# EAGLE board CT_schematic (EAGLE 7.6.0)

Size 100 x 80 mm. Coordinates in mm from the lower left corner, seen from the top.
Outline: 0,0 100,0 100,80 0,80 0,0
Copper layers (1*16): Top 0.035mm / dielectric 1.5mm / Bottom 0.035mm
Design rules "default": minimum track width 10mil, minimum drill 24mil, track to track 8mil, track to pad 8mil, pad to pad 8mil, via to via 8mil, smd to smd 8mil, copper to edge 40mil, drill to drill 8mil, minimum pad ring 10mil, minimum via ring 8mil, stop-mask expansion 4mil, vias tented up to drill 0mil, thermal gap 10mil

## Footprints (pad centres in the part's own frame; a part is rotated, then mirrored left to right if it is on the bottom)
C0603 = smd 0.8 x 0.8: 1 -0.762,0; 2 0.762,0
C0402 = smd 0.5 x 0.5: 1 -0.508,0; 2 0.508,0
C0805 = smd 1.2 x 1.3: 1 -1.016,0; 2 1.016,0
C1206 = smd 1.3 x 1.6: 1 -1.524,0; 2 1.524,0
C1210 = smd 1.2 x 2.5: 1 -1.524,0; 2 1.524,0
2220 = smd 1.85 x 5.5: 1 -2.55,0; 2 2.55,0
EXV-9H = smd 3.505 x 1.676: 1 -2.857,0; 2 2.857,0
L0603 = smd 0.8 x 0.8: 1 -0.762,0; 2 0.762,0
R0603 = smd 0.8 x 0.8: 1 -0.762,0; 2 0.762,0
WE-HCI_7030/7040/7050 = smd 2.5 x 3: 1 -2.45,0; 2 2.45,0
PJ-037B_PACKAGE = drill 3.7 square: 1 12,0 | drill 3.2 square: 2 6,0
LQFP144 = smd 0.35 x 1.35: 1 -8.75,-10.625; 2 -8.25,-10.625; 3 -7.75,-10.625; 4 -7.25,-10.625; 5 -6.75,-10.625; 6 -6.25,-10.625; 7 -5.75,-10.625; 8 -5.25,-10.625; 9 -4.75,-10.625; 10 -4.25,-10.625; 11 -3.75,-10.625; 12 -3.25,-10.625; 13 -2.75,-10.62; 14 -2.25,-10.625; 15 -1.75,-10.625; 16 -1.25,-10.625; 17 -0.75,-10.625; 18 -0.25,-10.625; 19 0.25,-10.625; 20 0.75,-10.625; 21 1.25,-10.625; 22 1.75,-10.625; 23 2.25,-10.625; 24 2.75,-10.62; 25 3.25,-10.625; 26 3.75,-10.625; 27 4.25,-10.625; 28 4.75,-10.625; 29 5.25,-10.625; 30 5.75,-10.625; 31 6.25,-10.625; 32 6.75,-10.625; 33 7.25,-10.625; 34 7.75,-10.625; 35 8.25,-10.625; 36 8.75,-10.625; 73 8.75,10.625; 74 8.25,10.625; 75 7.75,10.625; 76 7.25,10.625; 77 6.75,10.625; 78 6.25,10.625; 79 5.75,10.625; 80 5.25,10.625; 81 4.75,10.625; 82 4.25,10.625; 83 3.75,10.625; 84 3.25,10.625; 85 2.75,10.625; 86 2.25,10.625; 87 1.75,10.625; 88 1.25,10.625; 89 0.75,10.625; 90 0.25,10.625; 91 -0.25,10.625; 92 -0.75,10.625; 93 -1.25,10.625; 94 -1.75,10.625; 95 -2.25,10.625; 96 -2.75,10.625; 97 -3.25,10.625; 98 -3.75,10.625; 99 -4.25,10.625; 100 -4.75,10.625; 101 -5.25,10.625; 102 -5.75,10.625; 103 -6.25,10.625; 104 -6.75,10.625; 105 -7.25,10.625; 106 -7.75,10.625; 107 -8.25,10.625; 108 -8.75,10.625 | smd 1.35 x 0.35: 37 10.625,-8.75; 38 10.625,-8.25; 39 10.625,-7.75; 40 10.625,-7.25; 41 10.625,-6.75; 42 10.625,-6.25; 43 10.625,-5.75; 44 10.625,-5.25; 45 10.625,-4.75; 46 10.625,-4.25; 47 10.625,-3.75; 48 10.625,-3.25; 49 10.625,-2.75; 50 10.625,-2.25; 51 10.625,-1.75; 52 10.625,-1.25; 53 10.625,-0.75; 54 10.625,-0.25; 55 10.625,0.25; 56 10.625,0.75; 57 10.625,1.25; 58 10.625,1.75; 59 10.625,2.25; 60 10.625,2.75; 61 10.625,3.25; 62 10.625,3.75; 63 10.625,4.25; 64 10.625,4.75; 65 10.625,5.25; 66 10.625,5.75; 67 10.625,6.25; 68 10.625,6.75; 69 10.625,7.25; 70 10.625,7.75; 71 10.625,8.25; 72 10.625,8.75; 109 -10.625,8.75; 110 -10.625,8.25; 111 -10.625,7.75; 112 -10.625,7.25; 113 -10.625,6.75; 114 -10.625,6.25; 115 -10.625,5.75; 116 -10.625,5.25; 117 -10.625,4.75; 118 -10.625,4.25; 119 -10.625,3.75; 120 -10.625,3.25; 121 -10.625,2.75; 122 -10.625,2.25; 123 -10.625,1.75; 124 -10.625,1.25; 125 -10.625,0.75; 126 -10.625,0.25; 127 -10.625,-0.25; 128 -10.625,-0.75; 129 -10.625,-1.25; 130 -10.625,-1.75; 131 -10.625,-2.25; 132 -10.625,-2.75; 133 -10.625,-3.25; 134 -10.625,-3.75; 135 -10.625,-4.25; 136 -10.625,-4.75; 137 -10.625,-5.25; 138 -10.625,-5.75; 139 -10.625,-6.25; 140 -10.625,-6.75; 141 -10.625,-7.25; 142 -10.625,-7.75; 143 -10.625,-8.25; 144 -10.625,-8.75
SOT-23-6 = smd 1.1 x 0.6: 1 -1.4,0.95; 2 -1.4,0; 3 -1.4,-0.95; 4 1.4,-0.95; 5 1.4,0; 6 1.4,0.95
SOIC-8 = smd 1.6 x 0.6: 1 -2.7,1.905 | smd 1.55 x 0.6: 2 -2.7,0.635; 3 -2.7,-0.635; 4 -2.7,-1.905; 5 2.7,-1.905; 6 2.7,-0.635; 7 2.7,0.635; 8 2.7,1.905
QFN-32 = smd 0.6 x 0.3: 1 -2.3,1.75; 2 -2.3,1.25; 3 -2.3,0.75; 4 -2.3,0.25; 5 -2.3,-0.25; 6 -2.3,-0.75; 7 -2.3,-1.25; 8 -2.3,-1.75; 17 2.3,-1.75; 18 2.3,-1.25; 19 2.3,-0.75; 20 2.3,-0.25; 21 2.3,0.25; 22 2.3,0.75; 23 2.3,1.25; 24 2.3,1.75 | smd 0.3 x 0.6: 9 -1.75,-2.3; 10 -1.25,-2.3; 11 -0.75,-2.3; 12 -0.25,-2.3; 13 0.25,-2.3; 14 0.75,-2.3; 15 1.25,-2.3; 16 1.75,-2.3; 25 1.75,2.3; 26 1.25,2.3; 27 0.75,2.3; 28 0.25,2.3; 29 -0.25,2.3; 30 -0.75,2.3; 31 -1.25,2.3; 32 -1.75,2.3 | smd 3.2 x 3.2: EXP 0,0
7498011122R = smd 0.71 x 2.29: 1 -3.545,-3.18; 2 -2.525,-3.18; 3 -1.505,-3.18; 4 -0.485,-3.18; 5 0.535,-3.18; 6 1.555,-3.18; 8 3.595,-3.18; 9 5.635,-3.18; 10 6.655,-3.18; 11 -6.605,-3.18; 12 -5.585,-3.18 | smd 1.4 x 2.54: 13 -8.51,10.2; 14 8.51,10.2 | hole 1.4: -3.5,0; 3.5,0
S29VS256RABBHW000 = smd 0.3 x 0.3: A1 -6,3; A14 0.5,3; C3 -5,2; C4 -4.5,2; C5 -4,2; C6 -3.5,2; C7 -3,2; C8 -2.5,2; C9 -2,2; C10 -1.5,2; C11 -1,2; C12 -0.5,2; D3 -5,1.5; D4 -4.5,1.5; D5 -4,1.5; D6 -3.5,1.5; D7 -3,1.5; D8 -2.5,1.5; D9 -2,1.5; D10 -1.5,1.5; D11 -1,1.5; D12 -0.5,1.5; E3 -5,1; E4 -4.5,1; E5 -4,1; E6 -3.5,1; E7 -3,1; E8 -2.5,1; E9 -2,1; E10 -1.5,1; E11 -1,1; E12 -0.5,1; F3 -5,0.5; F4 -4.5,0.5; F5 -4,0.5; F6 -3.5,0.5; F7 -3,0.5; F8 -2.5,0.5; F9 -2,0.5; F10 -1.5,0.5; F11 -1,0.5; F12 -0.5,0.5; H1 -6,-0.5; H14 0.5,-0.5
MICRO_USB_AB = smd 0.4 x 1.35: 1 1.3,0.26; 2 0.65,0.26; 3 0,0.26; 4 -0.65,0.26; 5 -1.3,0.26 | drill 0.6 pad 0.95 long: 6 4.175,-2.54; 7 -4.175,-2.54 | drill 0.7 pad 1.1 long: 8 -2.225,0.46; 9 2.225,0.46
SOT143B = smd 1 x 0.7: 1 -0.75,-1 | smd 0.6 x 0.7: 2 0.95,-1; 3 0.95,1; 4 -0.95,1
ABS07-32.768KHZ-7-T = smd 1.1 x 2.4: 1 -2.5,0; 2 0,0
ABLS-25.000MHZ-B2F-T = smd 5.6 x 2.8: 1 -3.81,0; 2 5.69,0
ASFL1 = smd 1.7 x 1.5: 1 -1.27,-1.1; 2 1.27,-1.1; 3 1.27,1.1; 4 -1.27,1.1
WSON-8 = smd 0.3 x 0.6: 1 -0.75,0; 2 0.05,0; 3 0.85,0; 4 1.65,0; 5 1.65,3.8; 6 0.85,3.8; 7 0.05,3.8; 8 -0.75,3.8 | smd 3 x 2.6: PAD 0.45,1.9
SOIC-8_EP = smd 1.6 x 0.533: 1 -2.921,1.905; 2 -2.921,0.635; 3 -2.921,-0.635; 4 -2.921,-1.905; 5 2.921,-1.905; 6 2.921,-0.635; 7 2.921,0.635; 8 2.921,1.905 | smd 2.54 x 3.302: EPAD 0,0 | drill 0.406 pad 0.406: P$1 -0.508,0.635; P$2 0.381,0.635; P$3 -0.508,-0.635; P$4 0.381,-0.635
QFN-16_EP = smd 0.805 x 0.3: 1 -1.452,0.75; 2 -1.452,0.25; 3 -1.452,-0.25; 4 -1.452,-0.75; 9 1.452,-0.75; 10 1.452,-0.25; 11 1.452,0.25; 12 1.452,0.75 | smd 0.3 x 0.805: 5 -0.75,-1.452; 6 -0.25,-1.452; 7 0.25,-1.452; 8 0.75,-1.452; 13 0.75,1.452; 14 0.25,1.452; 15 -0.25,1.452; 16 -0.75,1.452 | smd 1.55 x 1.55: 17 0,0
SON-6 = smd 0.55 x 0.3: 1 -0.355,0.5 | smd 0.52 x 0.3: 2 -0.37,0; 3 -0.37,-0.5; 4 0.37,-0.5; 5 0.37,0; 6 0.37,0.5
SW_4-1437565-2 = smd 1.4 x 2.1: 1 -2.23,4.55; 2 -2.23,-4.55; 3 2.23,4.55; 4 2.23,-4.55
LGM67K-G1J2-24-Z = smd 0.8 x 1.4: A -2,0; C 0,0
NC7SZ125M5X = smd 1.3 x 0.7: 1 -1.3,0.95; 2 -1.3,0; 3 -1.3,-0.95; 4 1.3,-0.95; 5 1.3,0.95
DUMMY_PACKAGE_256 = drill 0.3: 1 0,-1; 2 1.5,-1; 3 3,-1

## Placement (x,y rotation side)
C1  1e-06  [C0603]  -26.67,77.47 0 top  (outside the outline)
C2  1e-07  [C0603]  -30.48,77.47 0 top  (outside the outline)
C3  1e-07  [C0603]  -34.29,77.47 0 top  (outside the outline)
C4  1e-07  [C0603]  -38.1,77.47 0 top  (outside the outline)
C5  1e-07  [C0603]  -41.91,77.47 0 top  (outside the outline)
C6  1e-07  [C0603]  -45.72,77.47 0 top  (outside the outline)
C7  1e-07  [C0603]  -49.53,77.47 0 top  (outside the outline)
C8  1e-07  [C0603]  -53.34,77.47 0 top  (outside the outline)
C9  1e-07  [C0603]  -57.15,77.47 0 top  (outside the outline)
C10  1e-07  [C0603]  -60.96,77.47 0 top  (outside the outline)
C11  1e-07  [C0603]  -64.77,77.47 0 top  (outside the outline)
C12  1e-07  [C0603]  -68.58,77.47 0 top  (outside the outline)
C13  1e-07  [C0603]  -72.39,77.47 0 top  (outside the outline)
C14  4.7e-06  [C0603]  -80.01,72.39 0 top  (outside the outline)
C15  2.2e-09  [C0603]  -83.82,72.39 0 top  (outside the outline)
C16  2.2e-09  [C0603]  -87.63,72.39 0 top  (outside the outline)
C17  1e-08  [C0603]  -76.2,77.47 0 top  (outside the outline)
C18  1e-06  [C0603]  -80.01,77.47 0 top  (outside the outline)
C19  1e-11  [C0402]  -49.53,87.63 0 top  (outside the outline)
C20  1e-11  [C0402]  -53.34,87.63 0 top  (outside the outline)
C21  1e-11  [C0402]  -57.15,87.63 0 top  (outside the outline)
C22  1e-11  [C0402]  -60.96,87.63 0 top  (outside the outline)
C23  1e-08  [C0402]  -64.77,87.63 0 top  (outside the outline)
C24  1e-07  [C0402]  -68.58,87.63 0 top  (outside the outline)
C25  1e-07  [C0402]  -72.39,87.63 0 top  (outside the outline)
C26  2.2e-06  [C0603]  -15.24,77.47 0 top  (outside the outline)
C27  1e-07  [C0402]  -76.2,87.63 0 top  (outside the outline)
C28  1e-07  [C0402]  -80.01,87.63 0 top  (outside the outline)
C29  1e-05  [C0805]  -21.59,67.31 0 top  (outside the outline)
C30  1e-07  [C0402]  -83.82,87.63 0 top  (outside the outline)
C31  2.2e-11  [C0402]  -41.91,87.63 0 top  (outside the outline)
C32  2.2e-11  [C0402]  -45.72,87.63 0 top  (outside the outline)
C33  1e-07  [C0402]  -87.63,87.63 0 top  (outside the outline)
C34  2.2e-06  [C0603]  -19.05,77.47 0 top  (outside the outline)
C35  1e-07  [C0402]  -15.24,92.71 0 top  (outside the outline)
C36  2.2e-06  [C0603]  -22.86,77.47 0 top  (outside the outline)
C37  1e-08  [C0402]  -19.05,92.71 0 top  (outside the outline)
C38  1e-08  [C0402]  -22.86,92.71 0 top  (outside the outline)
C39  1e-05  [C1206]  -63.5,59.69 0 top  (outside the outline)
C40  1e-05  [C0805]  -26.67,67.31 0 top  (outside the outline)
C41  1e-05  [C1210]  -38.1,60.96 0 top  (outside the outline)
C42  1e-05  [C1210]  -44.45,60.96 0 top  (outside the outline)
C43  1e-05  [C1210]  -50.8,60.96 0 top  (outside the outline)
C44  1e-05  [C1210]  -57.15,60.96 0 top  (outside the outline)
C45  1e-05  [C0805]  -31.75,67.31 0 top  (outside the outline)
C46  1e-06  [C0603]  -83.82,77.47 0 top  (outside the outline)
C47  1e-07  [C0402]  -26.67,92.71 0 top  (outside the outline)
C48  6.8e-05  [2220]  -78.74,33.02 0 top  (outside the outline)
C49  1e-07  [C0402]  -30.48,92.71 0 top  (outside the outline)
C50  0.0001  [EXV-9H]  -76.2,44.45 0 top  (outside the outline)
C51  0.0001  [EXV-9H]  -17.78,53.34 0 top  (outside the outline)
C52  1e-08  [C0402]  -34.29,92.71 0 top  (outside the outline)
C53  1e-08  [C0402]  -38.1,92.71 0 top  (outside the outline)
C54  1e-08  [C0402]  -41.91,92.71 0 top  (outside the outline)
F1  240.0  [L0603]  -87.63,77.47 0 top  (outside the outline)
I1  97.0  [R0603]  -15.24,82.55 0 top  (outside the outline)
I5  3.3e-06  [WE-HCI_7030/7040/7050]  -17.78,34.29 0 top  (outside the outline)
J1  PJ-037B  [PJ-037B_PACKAGE]  -71.12,7.62 0 top  (outside the outline)
R2  1000.0  [R0603]  -19.05,82.55 0 top  (outside the outline)
R4  4700.0  [R0603]  -22.86,82.55 0 top  (outside the outline)
R5  4700.0  [R0603]  -26.67,82.55 0 top  (outside the outline)
R6  4700.0  [R0603]  -30.48,82.55 0 top  (outside the outline)
R7  2200.0  [R0603]  -34.29,82.55 0 top  (outside the outline)
R8  2200.0  [R0603]  -38.1,82.55 0 top  (outside the outline)
R9  47000.0  [R0603]  -71.12,67.31 0 top  (outside the outline)
R10  10000.0  [R0603]  -76.2,67.31 0 top  (outside the outline)
R11  10000.0  [R0603]  -81.28,67.31 0 top  (outside the outline)
R12  10000.0  [R0603]  -86.36,67.31 0 top  (outside the outline)
R13  10000.0  [R0603]  -15.24,72.39 0 top  (outside the outline)
R14  10000.0  [R0603]  -20.32,72.39 0 top  (outside the outline)
R15  10000.0  [R0603]  -25.4,72.39 0 top  (outside the outline)
R16  10000.0  [R0603]  -30.48,72.39 0 top  (outside the outline)
R17  10000.0  [R0603]  -35.56,72.39 0 top  (outside the outline)
R18  0.1  [R0603]  -41.91,82.55 0 top  (outside the outline)
R19  0.1  [R0603]  -45.72,82.55 0 top  (outside the outline)
R20  200.0  [R0603]  -49.53,82.55 0 top  (outside the outline)
R21  220.0  [R0603]  -53.34,82.55 0 top  (outside the outline)
R22  6490.0  [R0603]  -57.15,82.55 0 top  (outside the outline)
R23  4700.0  [R0603]  -60.96,82.55 0 top  (outside the outline)
R24  4700.0  [R0603]  -64.77,82.55 0 top  (outside the outline)
R25  1000.0  [R0603]  -68.58,82.55 0 top  (outside the outline)
R26  4700.0  [R0603]  -72.39,82.55 0 top  (outside the outline)
R27  1000.0  [R0603]  -76.2,82.55 0 top  (outside the outline)
R28  4700.0  [R0603]  -80.01,82.55 0 top  (outside the outline)
R29  1000.0  [R0603]  -83.82,82.55 0 top  (outside the outline)
R30  4700.0  [R0603]  -87.63,82.55 0 top  (outside the outline)
R31  4700.0  [R0603]  -15.24,87.63 0 top  (outside the outline)
R32  1000.0  [R0603]  -19.05,87.63 0 top  (outside the outline)
R33  10000.0  [R0603]  -40.64,72.39 0 top  (outside the outline)
R34  10000.0  [R0603]  -45.72,72.39 0 top  (outside the outline)
R35  10000.0  [R0603]  -50.8,72.39 0 top  (outside the outline)
R36  10000.0  [R0603]  -55.88,72.39 0 top  (outside the outline)
R37  100000.0  [R0603]  -45.72,67.31 0 top  (outside the outline)
R38  806.0  [R0603]  -22.86,87.63 0 top  (outside the outline)
R39  1000.0  [R0603]  -26.67,87.63 0 top  (outside the outline)
R40  4031.5447154472  [R0603]  -40.64,67.31 0 top  (outside the outline)
R41  2200.0  [R0603]  -30.48,87.63 0 top  (outside the outline)
R42  20000.0  [R0603]  -60.96,72.39 0 top  (outside the outline)
R43  150000.0  [R0603]  -50.8,67.31 0 top  (outside the outline)
R44  300000.0  [R0603]  -55.88,67.31 0 top  (outside the outline)
R45  10000.0  [R0603]  -66.04,72.39 0 top  (outside the outline)
R46  10000.0  [R0603]  -71.12,72.39 0 top  (outside the outline)
R47  82000.0  [R0603]  -76.2,72.39 0 top  (outside the outline)
R48  300000.0  [R0603]  -60.96,67.31 0 top  (outside the outline)
R49  120000.0  [R0603]  -66.04,67.31 0 top  (outside the outline)
U1  STM32F429ZGT6  [LQFP144]  -44.45,11.43 0 top  (outside the outline)
U2  MAX4995AAUT+T  [SOT-23-6]  -68.58,59.69 0 top  (outside the outline)
U3  AT25M02-SSHD-T  [SOIC-8]  -69.85,33.02 0 top  (outside the outline)
U4  KSZ8081RNBIA-TR  [QFN-32]  -53.34,34.29 0 top  (outside the outline)
U5  7498011122R  [7498011122R]  -22.86,7.62 0 top  (outside the outline)
U6  S29VS256RABBHW000  [S29VS256RABBHW000]  -63.5,43.18 0 top  (outside the outline)
U7  47590-0001  [MICRO_USB_AB]  -80.01,7.62 0 top  (outside the outline)
U8  prtr5v0u2ax  [SOT143B]  -54.61,92.71 0 top  (outside the outline)
U9  ABS07-32.768KHZ-7-T  [ABS07-32.768KHZ-7-T]  -80.01,53.34 0 top  (outside the outline)
U10  ABLS-25.000MHZ-B2F-T  [ABLS-25.000MHZ-B2F-T]  -36.83,53.34 0 top  (outside the outline)
U11  ABLS-25.000MHZ-B2F-T  [ABLS-25.000MHZ-B2F-T]  -57.15,53.34 0 top  (outside the outline)
U12  ASFL1-50MHZ-NCS  [ASFL1]  -46.99,44.45 0 top  (outside the outline)
U13  LP3878SDX-ADJ/NOPB  [WSON-8]  -30.48,43.18 0 top  (outside the outline)
U14  MIC5234YME  [SOIC-8_EP]  -17.78,59.69 0 top  (outside the outline)
U15  LTC3601EUD#PBF  [QFN-16_EP]  -35.56,87.63 0 top  (outside the outline)
U16  TPS3895ADRYR  [SON-6]  -63.5,91.44 0 top  (outside the outline)
U17  4-1437565-2  [SW_4-1437565-2]  -36.83,34.29 0 top  (outside the outline)
U18  Q65110A2395  [LGM67K-G1J2-24-Z]  -26.67,60.96 0 top  (outside the outline)
U19  nc7sz125m5x  [NC7SZ125M5X]  -73.66,59.69 0 top  (outside the outline)
U20  nc7sz125m5x  [NC7SZ125M5X]  -80.01,59.69 0 top  (outside the outline)
U21  nc7sz125m5x  [NC7SZ125M5X]  -15.24,66.04 0 top  (outside the outline)
U22  Dummy  [DUMMY_PACKAGE_256]  -60.96,92.71 0 top  (outside the outline)

## Library data of the parts
C1-C54 F1 I1 I5 J1 R2 R4-R49 U1-U22 = circuit_tree

## Nets
CLK_CRYSTAL_U1_8: C19.1 U1.8 U9.1
CLK_CRYSTAL_U1_9: C20.1 U1.9 U9.2
CLK_CRYSTAL_U1_23: C21.1 U1.23 U10.1
CLK_CRYSTAL_U1_24: C22.1 U1.24 U10.2
CLK_CRYSTAL_U4_8: C31.1 U4.8 U11.2
CLK_CRYSTAL_U4_9: C32.1 U4.9 U11.1
CLK_U1_35: U1.35 U12.3
GND: C1.2 C2.2 C3.2 C4.2 C5.2 C6.2 C7.2 C8.2 C9.2 C10.2 C11.2 C12.2 C13.2 C14.2 C15.2 C16.2 C17.2 C18.2 C19.2 C20.2 C21.2 C22.2 C23.2 C24.2 C25.2 C26.2 C27.2 C28.2 C29.2 C30.2 C31.2 C32.2 C33.2 C34.2 C35.2 C36.2 C37.2 C38.2 C39.2 C40.2 C41.2 C42.2 C43.2 C44.2 C45.2 C46.2 C48.1 C48.2 C49.2 C50.2 C51.2 C52.2 C53.2 C54.2 J1.2 R2.2 R9.2 R12.2 R14.2 R18.2 R19.2 R22.2 R24.2 R25.2 R27.2 R29.2 R32.2 R39.2 R41.2 R42.2 R44.2 R47.2 R49.2 U1.16 U1.31 U1.38 U1.51 U1.61 U1.83 U1.94 U1.107 U1.120 U1.130 U2.2 U3.4 U4.1 U4.EXP U5.1 U5.10 U6.C5 U6.D12 U6.E3 U6.F5 U7.5 U7.6 U7.7 U7.8 U7.9 U8.1 U12.2 U13.3 U13.PAD U14.7 U14.EPAD U15.1 U15.9 U15.17 U16.2 U18.C U19.1 U19.3 U20.1 U20.3 U21.1 U21.3 U22.1
NET_U1_25: R6.1 U1.25 U21.4
NET_U1_27: R7.1 U1.27 U4.12
NET_U1_33: C17.1 C18.1 F1.1 U1.32 U1.33
NET_U1_36: R8.1 U1.36 U4.11
NET_U1_48: R12.1 U1.48
NET_U1_71: C15.1 U1.71
NET_U1_106: C16.1 U1.106
NET_U1_138: R11.1 U1.138
NET_U1_141: U18.A
NET_U1_142: U17.3 U17.4
NET_U1_143: R10.1 U1.143
NET_U2_3: R9.1 U2.3
NET_U3_3: R15.1 U3.3
NET_U3_7: R17.1 U3.7
NET_U4_2: C26.1 C27.1 U4.2
NET_U4_3: C28.1 I1.1 U4.3
NET_U4_10: R22.1 U4.10
NET_U4_13: R25.1 U4.13
NET_U4_14: R26.1 U4.14
NET_U4_19: R24.1 U4.19
NET_U4_20: R30.1 U4.20
NET_U4_21: R23.1 U4.21
NET_U4_28: R28.1 U4.28
NET_U4_29: R29.1 U4.29
NET_U4_31: R31.1 U4.31
NET_U4_32: R4.1 U4.32 U19.4
NET_U5_1: U4.7 U5.1
NET_U5_2: C24.1 U5.2
NET_U5_3: U4.6 U5.3
NET_U5_4: U4.5 U5.4
NET_U5_5: C25.1 U5.5
NET_U5_6: U4.4 U5.6
NET_U5_8: R19.1 U5.8
NET_U5_9: R20.1 U5.9
NET_U5_12: R21.1 U5.12
NET_U5_13: R18.1 U5.13 U5.14
NET_U5_30: R20.2
NET_U5_31: R21.2
NET_U6_C9: U6.C9
NET_U6_D8: R5.1 U6.D8 U20.4
NET_U13_1: C38.1 U13.1
NET_U13_6: R38.2 R39.1 U13.6
NET_U13_8: R37.1 U13.8
NET_U14_4: R40.2 R41.1 U14.4
NET_U15_3: C47.2 I5.1 U15.3 U15.4
NET_U15_6: C47.1 U15.6
NET_U15_7: C46.1 U15.7 U15.12
NET_U15_10: R44.1 U15.10
NET_U15_11: R42.1 R43.1 U15.11
NET_U15_14: U15.14
NET_U15_ATNET_3: I5.2 R43.2
NET_U16_1: R46.1 R47.1 U16.1
NET_U16_3: R48.2 R49.1 U16.3
NET_U16_4: R45.1 U16.4 U19.2 U20.2 U21.2
NET_U17_1: R2.1 U17.1 U17.2
PROC_ADC1_IN3: U1.37 U22.2
PROC_ADC1_IN12: U1.28 U22.3
PROC_ETH_CRS_DV: U1.43 U4.18
PROC_ETH_RXD0: R32.1 U1.44 U4.16
PROC_ETH_RXD1: R27.1 U1.45 U4.15
PROC_ETH_TX_EN: U1.70 U4.23
PROC_ETH_TXD0: U1.73 U4.24
PROC_ETH_TXD1: U1.74 U4.25
PROC_FMC_A16: U1.80 U6.D4
PROC_FMC_A17: U1.81 U6.C11
PROC_FMC_A18: U1.82 U6.D10
PROC_FMC_A19: U1.2 U6.C10
PROC_FMC_A20: U1.3 U6.D5
PROC_FMC_A21: U1.4 U6.C4
PROC_FMC_A22: U1.5 U6.C12
PROC_FMC_A23: U1.1 U6.D7
PROC_FMC_CLK: U1.117 U6.C6
PROC_FMC_D0: U1.85 U6.F3
PROC_FMC_D1: U1.86 U6.F4
PROC_FMC_D2: U1.114 U6.E6
PROC_FMC_D3: U1.115 U6.E7
PROC_FMC_D4: U1.58 U6.F8
PROC_FMC_D5: U1.59 U6.F9
PROC_FMC_D6: U1.60 U6.E10
PROC_FMC_D7: U1.63 U6.E11
PROC_FMC_D8: U1.64 U6.E4
PROC_FMC_D9: U1.65 U6.E5
PROC_FMC_D10: U1.66 U6.F6
PROC_FMC_D11: U1.67 U6.F7
PROC_FMC_D12: U1.68 U6.E8
PROC_FMC_D13: U1.77 U6.E9
PROC_FMC_D14: U1.78 U6.F11
PROC_FMC_D15: U1.79 U6.F12
PROC_FMC_NE2: R34.1 U1.124 U6.D11
PROC_FMC_NL: U1.137 U6.D6
PROC_FMC_NOE: R36.1 U1.118 U6.E12
PROC_FMC_NWAIT: R33.1 U1.122 U6.C3
PROC_FMC_NWE: R35.1 U1.119 U6.C8
PROC_GPIO_TO_U1_USB_FAULT: R13.1 U1.10 U2.6
PROC_GPIO_TO_U1_VBUS_EN: R14.1 U1.7 U2.4
PROC_SPI1_MISO: U1.42 U3.2
PROC_SPI1_MOSI: U1.135 U3.5
PROC_SPI1_NSS: R16.1 U1.40 U3.1
PROC_SPI1_SCK: U1.41 U3.6
PROC_USB_OTG_FS_DM: U1.103 U7.2 U8.3
PROC_USB_OTG_FS_DP: U1.104 U7.3 U8.2
PROC_USB_OTG_FS_ID: U1.102 U7.4
PROC_USB_OTG_FS_VBUS: U1.101 U2.1 U7.1 U8.4
VCC_S1_5V9: C39.1 C41.1 C42.1 C45.1 C50.1 C51.1 J1.1 R37.2 U13.4 U14.5 U14.8 U15.15 U15.16
VCC_TIER1_1V8: C1.1 C2.1 C3.1 C4.1 C5.1 C6.1 C7.1 C8.1 C9.1 C10.1 C11.1 C12.1 C13.1 C14.1 C23.1 C29.1 C30.1 C33.1 C34.1 C35.1 C36.1 C40.1 C49.1 C52.1 C53.1 C54.1 F1.2 R4.2 R5.2 R6.2 R7.2 R8.2 R10.2 R11.2 R13.2 R15.2 R16.2 R17.2 R23.2 R26.2 R28.2 R30.2 R31.2 R33.2 R34.2 R35.2 R36.2 R38.1 R45.2 R46.2 R48.1 U1.6 U1.17 U1.30 U1.39 U1.52 U1.62 U1.72 U1.84 U1.95 U1.108 U1.121 U1.131 U1.144 U3.8 U4.17 U6.C7 U6.D3 U6.F10 U13.5 U16.6 U19.5 U20.5 U21.5
VCC_TIER1_3V3: C37.1 C43.1 C44.1 I1.2 R40.1 U12.4 U14.1
VCC_TIER1_5V0: C48.2 I5.2 R43.2 U2.5 U15.8

## Tracks (layer width: path | path; a pad name or v marks a point on that pad's centre or on a via)
CLK_CRYSTAL_U1_8  (2 unrouted)
CLK_CRYSTAL_U1_9  (2 unrouted)
CLK_CRYSTAL_U1_23  (2 unrouted)
CLK_CRYSTAL_U1_24  (2 unrouted)
CLK_CRYSTAL_U4_8  (2 unrouted)
CLK_CRYSTAL_U4_9  (2 unrouted)
CLK_U1_35  (1 unrouted)
GND  (115 unrouted)
NET_U1_25  (2 unrouted)
NET_U1_27  (2 unrouted)
NET_U1_33  (4 unrouted)
NET_U1_36  (2 unrouted)
NET_U1_48  (1 unrouted)
NET_U1_71  (1 unrouted)
NET_U1_106  (1 unrouted)
NET_U1_138  (1 unrouted)
NET_U1_142  (1 unrouted)
NET_U1_143  (1 unrouted)
NET_U2_3  (1 unrouted)
NET_U3_3  (1 unrouted)
NET_U3_7  (1 unrouted)
NET_U4_2  (2 unrouted)
NET_U4_3  (2 unrouted)
NET_U4_10  (1 unrouted)
NET_U4_13  (1 unrouted)
NET_U4_14  (1 unrouted)
NET_U4_19  (1 unrouted)
NET_U4_20  (1 unrouted)
NET_U4_21  (1 unrouted)
NET_U4_28  (1 unrouted)
NET_U4_29  (1 unrouted)
NET_U4_31  (1 unrouted)
NET_U4_32  (2 unrouted)
NET_U5_1  (1 unrouted)
NET_U5_2  (1 unrouted)
NET_U5_3  (1 unrouted)
NET_U5_4  (1 unrouted)
NET_U5_5  (1 unrouted)
NET_U5_6  (1 unrouted)
NET_U5_8  (1 unrouted)
NET_U5_9  (1 unrouted)
NET_U5_12  (1 unrouted)
NET_U5_13  (2 unrouted)
NET_U6_D8  (2 unrouted)
NET_U13_1  (1 unrouted)
NET_U13_6  (2 unrouted)
NET_U13_8  (1 unrouted)
NET_U14_4  (2 unrouted)
NET_U15_3  (3 unrouted)
NET_U15_6  (1 unrouted)
NET_U15_7  (2 unrouted)
NET_U15_10  (1 unrouted)
NET_U15_11  (2 unrouted)
NET_U15_ATNET_3  (1 unrouted)
NET_U16_1  (2 unrouted)
NET_U16_3  (2 unrouted)
NET_U16_4  (4 unrouted)
NET_U17_1  (2 unrouted)
PROC_ADC1_IN3  (1 unrouted)
PROC_ADC1_IN12  (1 unrouted)
PROC_ETH_CRS_DV  (1 unrouted)
PROC_ETH_RXD0  (2 unrouted)
PROC_ETH_RXD1  (2 unrouted)
PROC_ETH_TX_EN  (1 unrouted)
PROC_ETH_TXD0  (1 unrouted)
PROC_ETH_TXD1  (1 unrouted)
PROC_FMC_A16  (1 unrouted)
PROC_FMC_A17  (1 unrouted)
PROC_FMC_A18  (1 unrouted)
PROC_FMC_A19  (1 unrouted)
PROC_FMC_A20  (1 unrouted)
PROC_FMC_A21  (1 unrouted)
PROC_FMC_A22  (1 unrouted)
PROC_FMC_A23  (1 unrouted)
PROC_FMC_CLK  (1 unrouted)
PROC_FMC_D0  (1 unrouted)
PROC_FMC_D1  (1 unrouted)
PROC_FMC_D2  (1 unrouted)
PROC_FMC_D3  (1 unrouted)
PROC_FMC_D4  (1 unrouted)
PROC_FMC_D5  (1 unrouted)
PROC_FMC_D6  (1 unrouted)
PROC_FMC_D7  (1 unrouted)
PROC_FMC_D8  (1 unrouted)
PROC_FMC_D9  (1 unrouted)
PROC_FMC_D10  (1 unrouted)
PROC_FMC_D11  (1 unrouted)
PROC_FMC_D12  (1 unrouted)
PROC_FMC_D13  (1 unrouted)
PROC_FMC_D14  (1 unrouted)
PROC_FMC_D15  (1 unrouted)
PROC_FMC_NE2  (2 unrouted)
PROC_FMC_NL  (1 unrouted)
PROC_FMC_NOE  (2 unrouted)
PROC_FMC_NWAIT  (2 unrouted)
PROC_FMC_NWE  (2 unrouted)
PROC_GPIO_TO_U1_USB_FAULT  (2 unrouted)
PROC_GPIO_TO_U1_VBUS_EN  (2 unrouted)
PROC_SPI1_MISO  (1 unrouted)
PROC_SPI1_MOSI  (1 unrouted)
PROC_SPI1_NSS  (2 unrouted)
PROC_SPI1_SCK  (1 unrouted)
PROC_USB_OTG_FS_DM  (2 unrouted)
PROC_USB_OTG_FS_DP  (2 unrouted)
PROC_USB_OTG_FS_ID  (1 unrouted)
PROC_USB_OTG_FS_VBUS  (3 unrouted)
VCC_S1_5V9  (12 unrouted)
VCC_TIER1_1V8  (73 unrouted)
VCC_TIER1_3V3  (6 unrouted)
VCC_TIER1_5V0  (4 unrouted)